# Altium PCB cw312_sam4s.PcbDoc
Units mil, origin at the board's own origin, x right, y up, seen from the top; angles counter-clockwise.
Board outline 2310.04 x 2113.83 mil, 2 copper layers (Top Layer, Bottom Layer); 24 components, 50 nets, 176 pads, 87 vias.
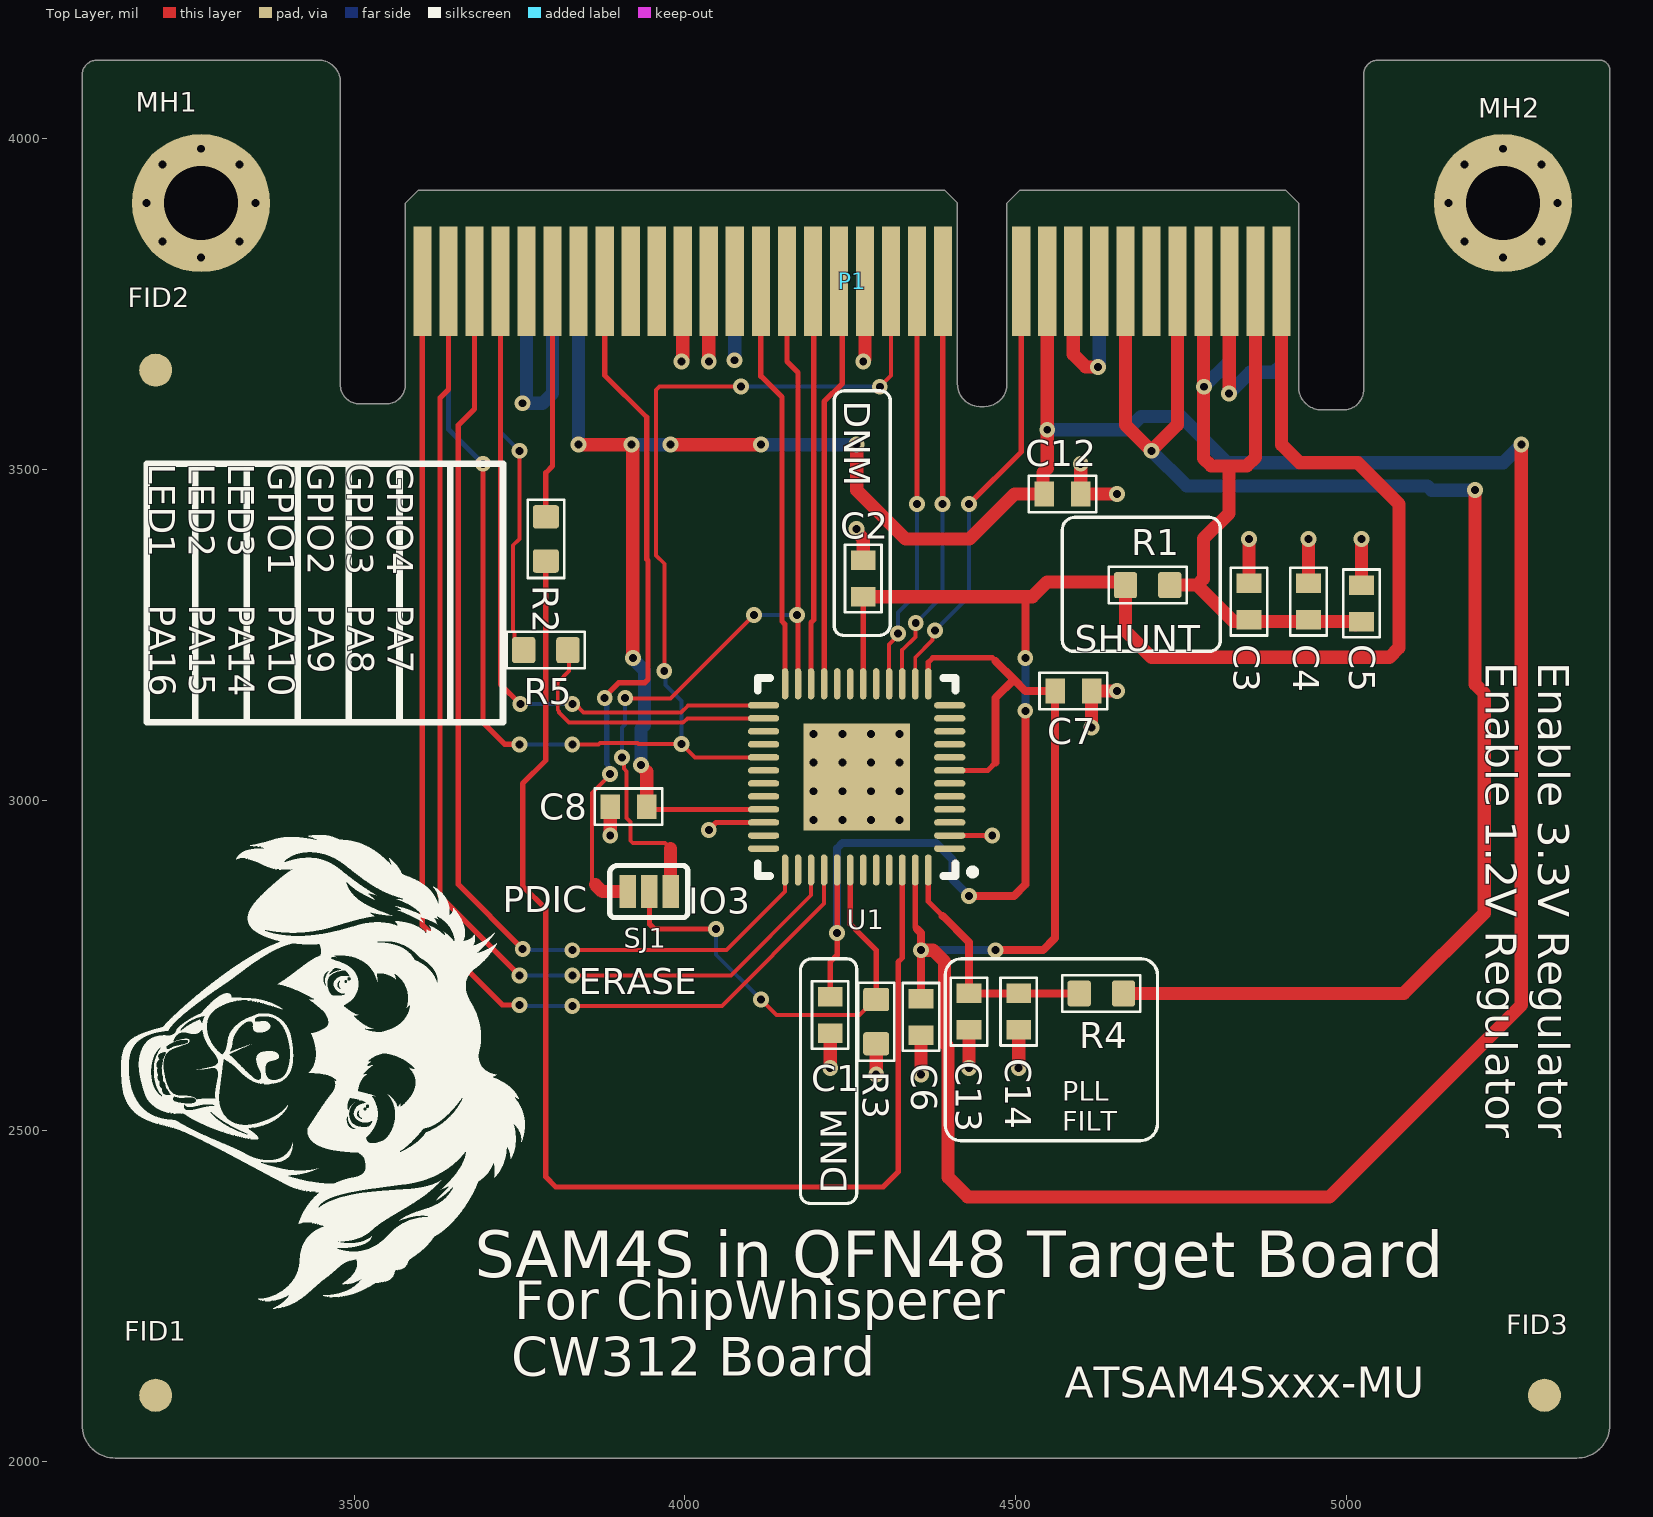
[diagram p0: Top Layer view]
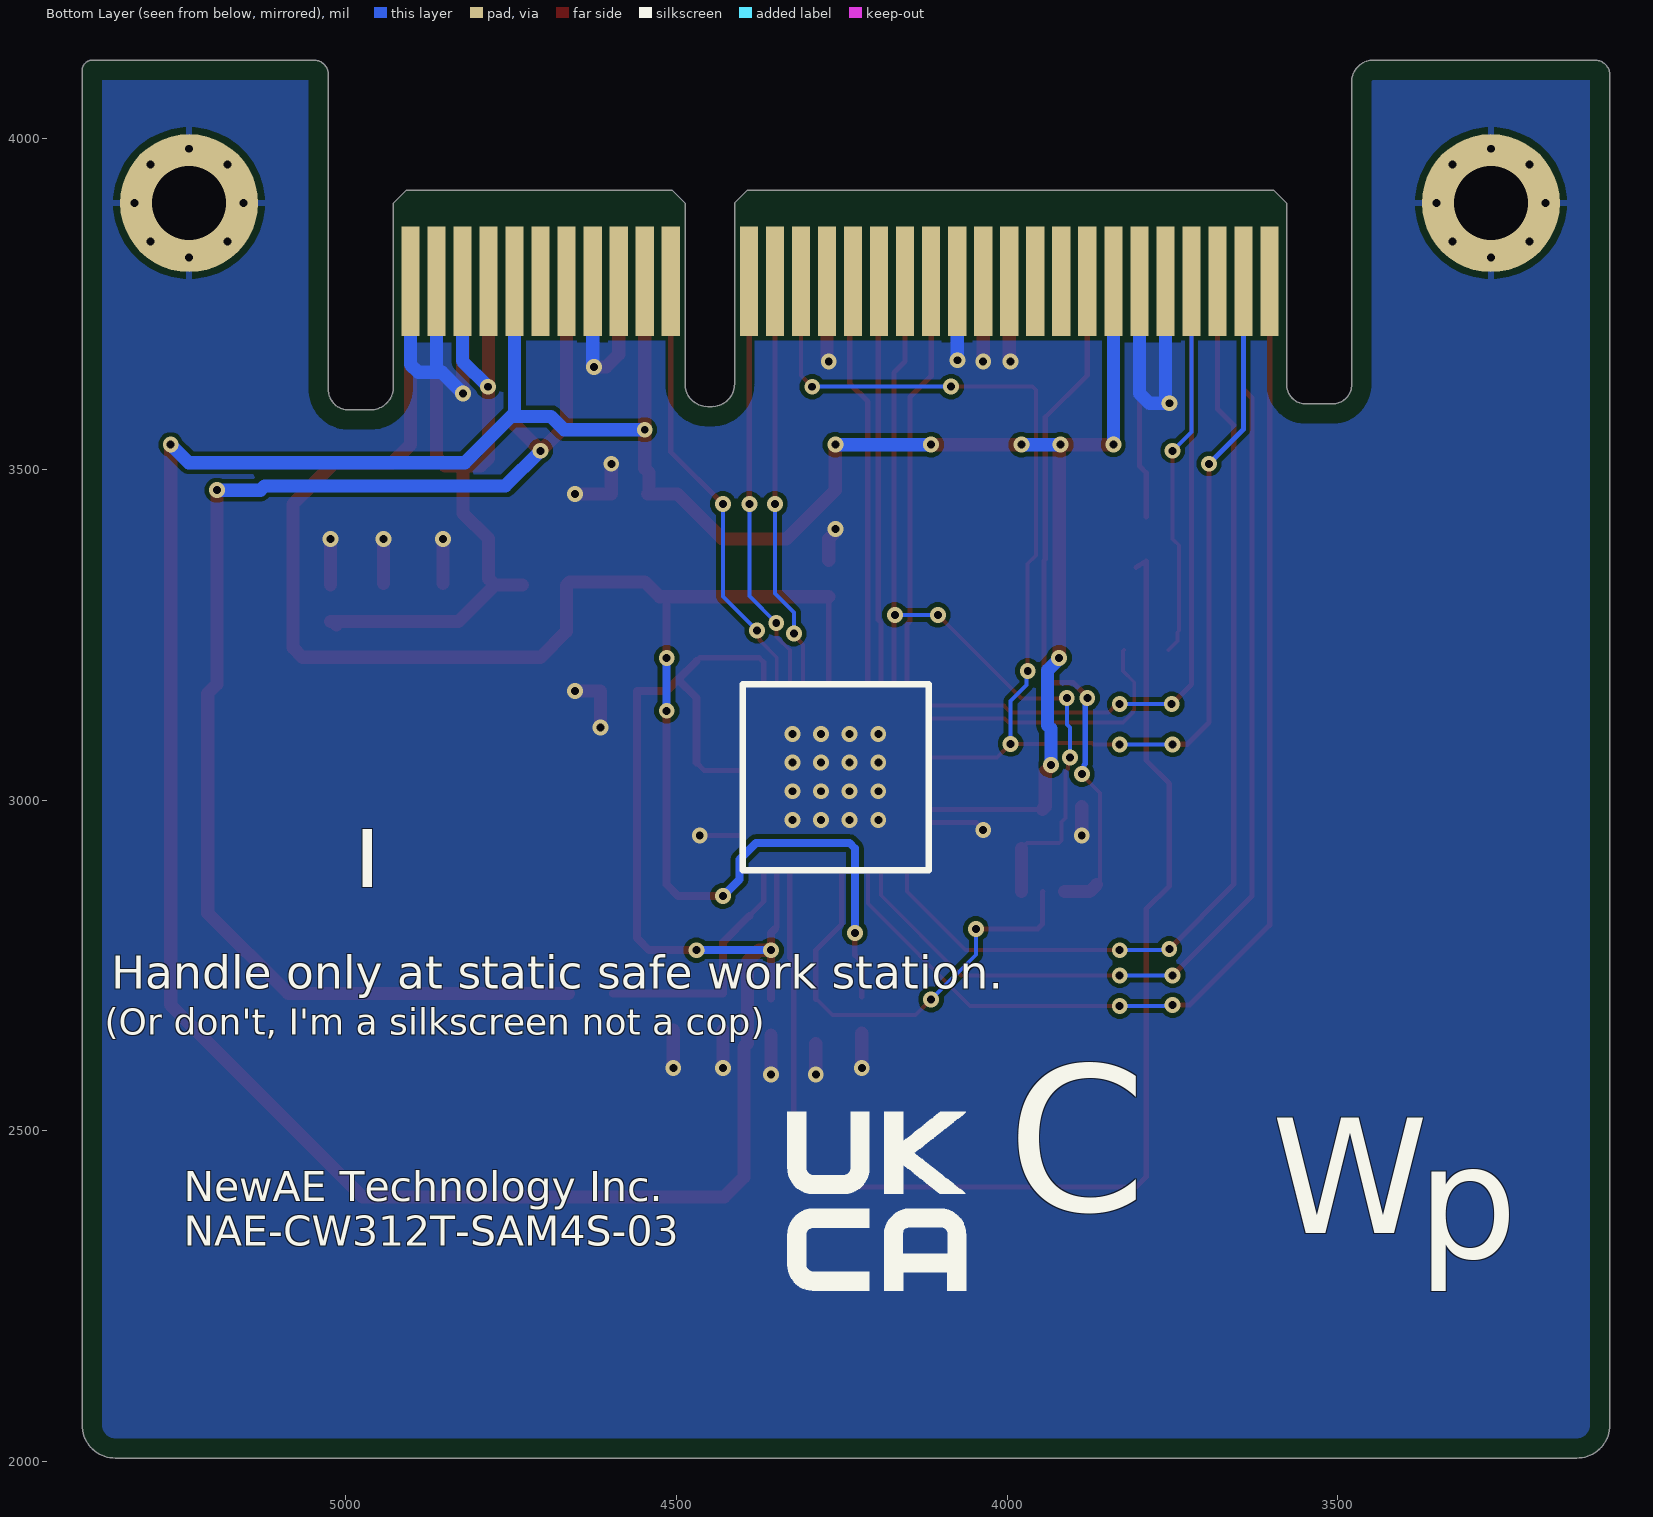
[diagram p1: Bottom Layer view, seen from below]
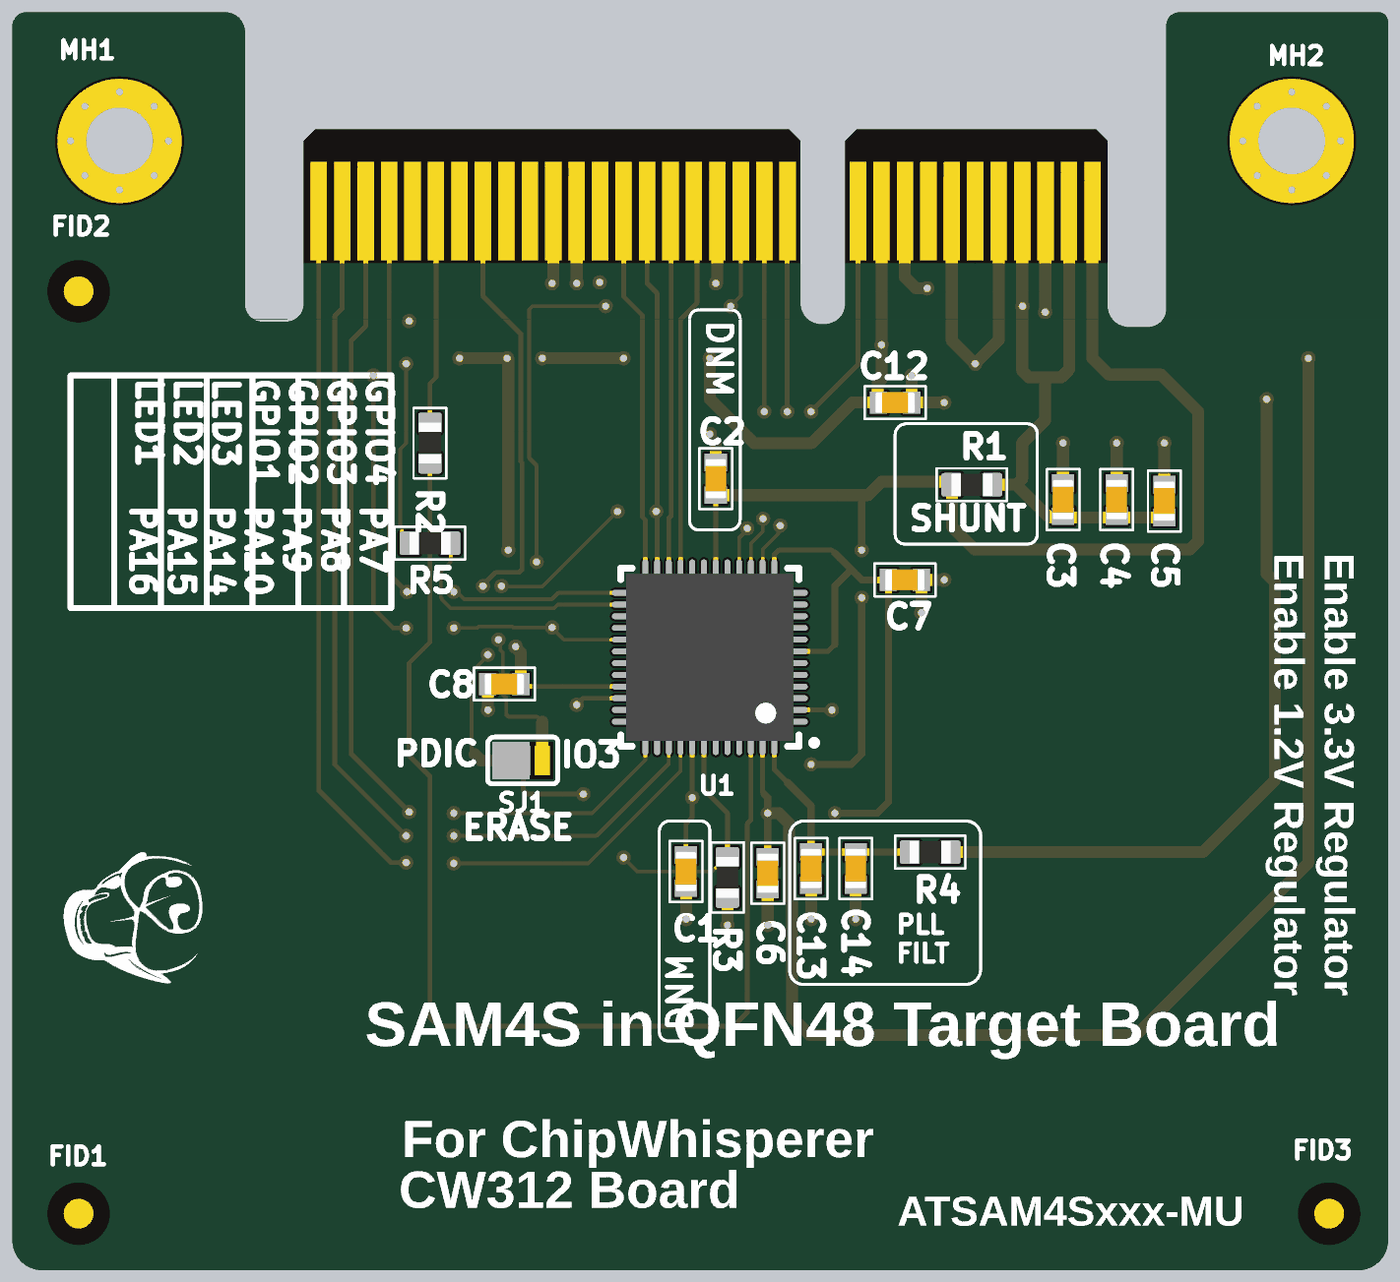
[diagram p2: 3D render of the assembled board from above, using the file's embedded part models]

## Layer stack, top to bottom
Top Solder: solder mask 0.4, Solder Resist, Dk 3.5
Top Layer: signal copper 1.4
Dielectric 1: dielectric 12.6, FR-4, Dk 4.8
Bottom Layer: signal copper 1.4
Bottom Solder: solder mask 0.4, Solder Resist, Dk 3.5

## Board outline
3088.86,2055 ccw(c3138.86,2055) 3138.86,2005 5348.9,2005 ccw(c5348.9,2055) 5398.9,2055 5398.9,4103.09 ccw(c5383.15,4103.09) 5383.15,4118.83 5048.5,4118.83 ccw(c5048.5,4096.91) 5026.58,4096.91 5026.58,3620.53 cw(c4996.05,3620.53) 4996.05,3590 4963.17,3590 cw(c4963.17,3625.02) 4928.15,3625.02 4928.15,3902.65 4908.46,3922.34 4506.89,3922.34 4487.2,3902.65 4487.2,3629.03 cw(c4453.17,3629.03) 4453.17,3595 4446.43,3595 cw(c4446.43,3629.03) 4412.4,3629.03 4412.4,3902.65 4392.72,3922.34 3597.44,3922.34 3577.76,3902.65 3577.76,3628.4 cw(c3548.35,3628.4) 3548.35,3599 3508.41,3599 cw(c3508.41,3628.08) 3479.33,3628.08 3479.33,4085.65 ccw(c3446.14,4085.65) 3446.14,4118.83 3111.5,4118.83 ccw(c3111.5,4096.2) 3088.86,4096.2

## Design rules (kind name [scope] priority, off if disabled: settings)
BoardOutlineClearance Silk_to_Outline [(OnLayer('Top Overlay'))] p1: gap=0 ignorepadtopadclearanceinfootprint=FALSE
BoardOutlineClearance [All] p2: gap=30 ignorepadtopadclearanceinfootprint=FALSE except(5: Track-OutlineEdge Track-CavityEdge Track-CutoutEdge Track-SplitBarrior Track-SplitContinuation SMDPad-OutlineEdge SMDPad-CavityEdge SMDPad-CutoutEdge SMDPad-SplitBarrior SMDPad-SplitContinuation)
Clearance [All] p1: gap=7 ignorepadtopadclearanceinfootprint=FALSE
HoleSize [All] p1: absolutevalues=TRUE maxlimit=200 minlimit=1 maxpercent=80.000 minpercent=20.000
MinimumSolderMaskSliver [All] p1: minsoldermaskwidth=5
PlaneConnect PlaneConnect_viaDirect [IsVia] p1: planeconnectstyle=Direct reliefexpansion=20 reliefentries=4 reliefconductorwidth=10 reliefairgap=10
PlaneConnect [All] p2: planeconnectstyle=Relief reliefexpansion=20 reliefentries=4 reliefconductorwidth=10 reliefairgap=10
PolygonConnect PolygonConnect_viaDirect [All vs isVia] p1: connectstyle=Direct reliefconductorwidth=10 reliefentries=4 polygonreliefangle="90 Angle" airgapwidth=10
PolygonConnect [All] p2: connectstyle=Relief reliefconductorwidth=10 reliefentries=4 polygonreliefangle="90 Angle" airgapwidth=10
RoutingVias [All] p1: holewidth=12 width=24 viastyle="Through Hole" minholewidth=12 minwidth=24 maxholewidth=100 maxwidth=200
SilkToSilkClearance [All] p1: silktosilkclearance=5
SilkToSolderMaskClearance [IsPad] p1: minsilkscreentomaskgap=5 clearancetoexposedcopper=TRUE
SolderMaskExpansion [All] p1: expansion=4 istentingtop=FALSE
Width [All] p1: maxlimit=100 minlimit=6 preferedwidth=8 minimp=50.000000 maximp=50.000000 favimp=50.000000
25 further rules are at their usual default settings.

## Classes and differential pairs
component class cw312_sam4s_cardedge: MH1 MH2 P1
component class "Edge Connector": P1

## Components (designator, comment, footprint, x,y, rotation, side; value= is the part's Value field where it differs from the comment)
C1 "DNM" CAPC0603_M 4220,2675 r270 top value=100n
C2 "DNM" CAPC0603_M 4270,3335 r90 top value=100n
C3 "100n" CAPC0603_M 4853.19,3300 r90 top
C4 "100n" CAPC0603_M 4943.19,3300 r90 top
C5 "2u2" CAPC0603_M 5023.19,3297.44 r90 top
C6 "100n" CAPC0603_M 4357.2,2672.17 r270 top
C7 "100n" CAPC0603_M 4587.6,3165 r0 top
C8 "100n" CAPC0603_M 3915,2990 r180 top
C12 "2u2" CAPC0603_M 4571.21,3462.96 r0 top
C13 "2u2" CAPC0603_M 4430,2680 r270 top
C14 "100n" CAPC0603_M 4505,2680 r270 top
FID1 "FIDU-ROUND-1.0MM" FIDU-ROUND-1.0mm#1 3195,2100 r0 top
FID2 "FIDU-ROUND-1.0MM" FIDU-ROUND-1.0mm#2 3210.57,3663.35 r0 top
FID3 "FIDU-ROUND-1.0MM" FIDU-ROUND-1.0mm#3 5285,2110 r0 top
MH1 "4-40 MH, Tight Fit" MOUNT_#4_TIGHT 3268.7,3902.65 r0 top
MH2 "4-40 MH, Tight Fit" MOUNT_#4_TIGHT 5237.2,3902.65 r0 top
P1 "PCIeX4-GF-2D-1000-1K-O64" PCIeX4-GF-2D-1000-1K-O64 4528.54,3784.54 r180 top
R1 "10R" RESC1608X55N 4700,3325 r0 top
R2 "10R" RESC1608X55N 3790,3394.87 r270 top
R3 "1k" RESC1608X55N 4289.53,2665 r270 top
R4 "100R" RESC1608X55N 4630,2707.56 r180 top
R5 "10R" RESC1608X55N 3790,3226.68 r180 top
SJ1 "NC" SJ_3S_NC12 3946.11,2861.63 r0 top
U1 "ATSAM4S2AA-MU" QFN50P700X700X100_HS-49M 4260,3035 r180 top

## Footprints (in the part's own frame and the unit in brackets; to place one, negate y for a bottom-side part, rotate by r counter-clockwise, add the part's x,y. Pads: shape width x height; smd on the part's side, far side on the other; paste and mask are expansions set on the pad)
CAPC0603_M [mm]
  rect 0.75x0.95 smd: 1(-0.7,0) 2(0.7,0)
  silkscreen extent -1.3,-0.7 1.3,0.7, body extent -0.85,-0.45 0.85,0.45, height 0.9
FIDU-ROUND-1.0mm#1 [mil]
  round 50 smd paste-78.74 mask+27.56: M1(5,0)
FIDU-ROUND-1.0mm#2 [mil]
  round 50 smd paste-78.74 mask+27.56: M1(-10.57,-13.35)
FIDU-ROUND-1.0mm#3 [mil]
  round 50 smd paste-78.74 mask+27.56: M1(15,-10)
MOUNT_#4_TIGHT [mil]
  round 14 hole 12: 1(-82.21,0) 1(-58.13,-58.13) 1(-58.13,58.13) 1(0,-82.21) 1(0,82.21) 1(0,82.21) 1(58.13,-58.13) 1(58.13,58.13) 1(82.21,0)
  round 208.66 hole 112.2: 1(0,0)
PCIeX4-GF-2D-1000-1K-O64 [mm] "Golden finger, PCIeX4, Dual, Opposite, Pitch 1mm, 64-Position"
  rect 0.7x4.2 smd far side paste-1: A1(-9.5,0) A2(-8.5,0) A3(-7.5,0) A4(-6.5,0) A5(-5.5,0) A6(-4.5,0) A7(-3.5,0) A8(-2.5,0) A9(-1.5,0) A10(-0.5,0) A11(0.5,0) A12(3.5,0) A13(4.5,0) A14(5.5,0) A15(6.5,0) A16(7.5,0) A17(8.5,0) A18(9.5,0) A19(10.5,0) A20(11.5,0) A21(12.5,0) A22(13.5,0) A23(14.5,0) A24(15.5,0) A25(16.5,0) A26(17.5,0) A27(18.5,0) A28(19.5,0) A29(20.5,0) A30(21.5,0) A31(22.5,0) A32(23.5,0)
  rect 0.7x4.2 smd paste-1: B1(-9.5,0) B2(-8.5,0) B3(-7.5,0) B4(-6.5,0) B5(-5.5,0) B6(-4.5,0) B7(-3.5,0) B8(-2.5,0) B9(-1.5,0) B10(-0.5,0) B11(0.5,0) B12(3.5,0) B13(4.5,0) B14(5.5,0) B15(6.5,0) B16(7.5,0) B17(8.5,0) B18(9.5,0) B19(10.5,0) B20(11.5,0) B21(12.5,0) B22(13.5,0) B23(14.5,0) B24(15.5,0) B25(16.5,0) B26(17.5,0) B27(18.5,0) B28(19.5,0) B29(20.5,0) B30(21.5,0) B31(22.5,0) B32(23.5,0)
QFN50P700X700X100_HS-49M [mm] "QFN, 48-Leads, Body 7.00x7.00mm, Pitch 0.50mm, Thermal Pad 4.10x4.10mm, IPC Low Density"
  oval 1.2x0.25 smd: 1(-3.575,2.75) 2(-3.575,2.25) 3(-3.575,1.75) 4(-3.575,1.25) 5(-3.575,0.75) 6(-3.575,0.25) 7(-3.575,-0.25) 8(-3.575,-0.75) 9(-3.575,-1.25) 10(-3.575,-1.75) 11(-3.575,-2.25) 12(-3.575,-2.75) 25(3.575,-2.75) 26(3.575,-2.25) 27(3.575,-1.75) 28(3.575,-1.25) 29(3.575,-0.75) 30(3.575,-0.25) 31(3.575,0.25) 32(3.575,0.75) 33(3.575,1.25) 34(3.575,1.75) 35(3.575,2.25) 36(3.575,2.75)
  oval 0.25x1.2 smd: 13(-2.75,-3.575) 14(-2.25,-3.575) 15(-1.75,-3.575) 16(-1.25,-3.575) 17(-0.75,-3.575) 18(-0.25,-3.575) 19(0.25,-3.575) 20(0.75,-3.575) 21(1.25,-3.575) 22(1.75,-3.575) 23(2.25,-3.575) 24(2.75,-3.575) 37(2.75,3.575) 38(2.25,3.575) 39(1.75,3.575) 40(1.25,3.575) 41(0.75,3.575) 42(0.25,3.575) 43(-0.25,3.575) 44(-0.75,3.575) 45(-1.25,3.575) 46(-1.75,3.575) 47(-2.25,3.575) 48(-2.75,3.575)
  rect 4.1x4.1 smd: 49(0,0)
  silkscreen extent -4.57,-3.8 3.8,3.8, body extent -3.58,-3.58 3.58,3.58, height 1
RESC1608X55N [mm] "Chip Resistor, Body 1.6x0.8mm, EIA 0603, IPC Medium Density"
  round 0.254 on Mech15: 0(0,0)
  rrect25% 0.9x1 smd: 1(-0.85,0) 2(0.85,0)
  Top Layer pour cut-out: -0.6,0.5 0.6,0.5 0.6,-0.5 -0.6,-0.5
  silkscreen extent -1.5,-0.7 1.5,0.7, body extent -0.87,-0.47 0.88,0.48, height 0.54
SJ_3S_NC12 [mil] "3-Way Solder Jumper, pads 1-2 closed"
  rect 25x50 smd: 1(-32.43,0) 2(0,0)
  rect 25x50 smd paste-393.7: 3(32.44,0)
  silkscreen extent -60,-39 59,39

## Part data
C1 C2: library part CCHIP-100n-0603, Case-EIA=0603, Case-Metric=1608, Manufacture 1=Kemet, Manufacture Part Number 1=C0603C104K5RACTU, Rated Voltage=50VDC, Supplier Part Number 1=399-5089-2-ND, Component Group=Capacitor, Component Type=Standard, Mounting Technology=SMT, Part Number=CCHIP-100n-0603, Pin Count=2, Supplier 1=Digi-Key
C3 C4 C6 C7 C8 C14: library part CCHIP-100n-0603, "100n, 0603", Case-EIA=0603, Case-Metric=1608, Manufacture 1=Kemet, Manufacture Part Number 1=C0603C104K5RACTU, Rated Voltage=50VDC, Supplier Part Number 1=399-5089-2-ND, Component Group=Capacitor, Component Type=Standard, Mounting Technology=SMT, Part Number=CCHIP-100n-0603, Pin Count=2, Supplier 1=Digi-Key
C5 C12 C13: library part CCHIP-2u2-0603, "2u2, 0603", Case-EIA=0603, Case-Metric=1608, Manufacture 1=Samsung, Manufacture Part Number 1=CL10B225KP8NNNC, Rated Voltage=10VDC, Supplier Part Number 1=1276-1134-2-ND, Component Group=Capacitor, Component Type=Standard, Mounting Technology=SMT, Part Number=CCHIP-2u2-0603, Pin Count=2, Supplier 1=Digi-Key
FID1 FID2 FID3: "ROUND FIDUCIAL", Component Group="PCB Feature", Component Type="Standard (No BOM)", Part Number=FIDU-ROUND-1.0MM, Pin Count=0
MH1 MH2: library part MOUNT_#4_TIGHT, "Machine screw 4-40 Mounting Hole", Component Group=Mechanical, Component Type=Mechanical, Part Number=MOUNT_#4_TIGHT, Pin Count=1, PP Material Stack=0, PP Rotation=0
P1: library part CMP-0001-00031-2, "Golden finger, PCIeX4, Dual, Opposite, Pitch 1mm, 64-Position", ClassName="Edge Connector", Datasheet Version="rev2.0, Apr-2007", Mating Connector=Molex-87715-9106, Package Reference=PCIeX4-GF-2D-1000-1K-O64, Publisher=Altium
R1 R2 R5: library part RCHIP-10R-0603, "10R res, 0603, 1%, 1/10W", Case-EIA=0603, Case-Metric=1608, Manufacture 1=Yageo, Manufacture Part Number 1=RC0603FR-0710RL, Rated Power=0.1W, Rated Voltage=75VDC, Supplier Part Number 1=311-10.0HRCT-ND, Temperature Range="-55C to 155C", Tolerance=1%, Component Group=Resistor, Component Type=Standard, Mounting Technology=SMT, Part Number=RCHIP-10R-0603, Pin Count=2, Supplier 1=Digi-Key
R3: library part RCHIP-1K-0603, "1k res, 0603, 1%, 1/10W", Case-EIA=0603, Case-Metric=1608, Manufacture 1=Yageo, Manufacture Part Number 1=RC0603FR-071KL, Rated Power=0.1W, Rated Voltage=75VDC, Supplier Part Number 1=311-1.00KHRCT-ND, Temperature Range="-55C to 155C", Tolerance=1%, Component Group=Resistor, Component Type=Standard, Mounting Technology=SMT, Part Number=RCHIP-1K-0603, Pin Count=2, Supplier 1=Digi-Key
R4: library part RCHIP-100R-0603, "100R res, 0603, 1%, 1/10W", Case-EIA=0603, Case-Metric=1608, Manufacture 1=Yageo, Manufacture Part Number 1=RC0603FR-07100RL, Rated Power=0.1W, Rated Voltage=75VDC, Supplier Part Number 1=311-100HRCT-ND, Temperature Range="-55C to 155C", Tolerance=1%, Component Group=Resistor, Component Type=Standard, Mounting Technology=SMT, Part Number=RCHIP-100R-0603, Pin Count=2, Supplier 1=Digi-Key
SJ1: library part SJ_3S_12JMP, "Solder Jumper, NC", Component Group="PCB Feature", Component Type="Standard (No BOM)", Mounting Technology=COPPER, Part Number=SJ_3S_12JMP, Pin Count=3
U1: "ATSAM4S, 128KB FLASH, 48QFN", Case/Package=QFN, Frequency=120MHz, Manufacture 1=Microchip, Max Operating Temperature=85°C, Min Operating Temperature=-40°C, Component Group="Digital IC", Component Type=Standard, Core Architecture=ARM, Manufacture Part Number 1=ATSAM4S2AA-MU, Memory Size=128KB, Memory Type=FLASH, Mounting Technology=SMT, Number of I/Os=34, Number of Pins=48, Oscillator Type=Internal, Packaging=Tray, Part Number=ATSAM4S2AA-MU, Peripherals="Brown-out Detect/Reset", Pin Count=49, PP Material Stack=0, PP Rotation=0, PP Rotation1=0, Supplier 1=Digi-Key

## Via types
v1: diameter 24, hole 12, Top Layer to Bottom Layer, tented both sides, 70 vias
v2: diameter 24, hole 12, Top Layer to Bottom Layer, 17 vias

## Nets (pads, with @x,y where several pads share a name; then routed paths per layer and width w, separated by ;. In a path a pad name is that pad's centre, name@x,y a point inside that pad or via, vN(x,y) a via of type N, cw(c..) or ccw(c..) an arc to the next point about the centre after c; other vN are vias at no path point)
BOOT_MODE: P1.B25 SJ1.1 | length 1059.5
  Top Layer w6: 3865,2872.28 3860,2877.28 3860,3010.55 3887.2,3037.74 v1(3887.2,3039.15)
  Top Layer w8: P1.B25 3878.94,3642.43 3942.56,3578.8 3942.56,3364.09 3944.56,3362.09 3944.56,3182.25 3939.87,3177.57 3900.47,3177.57 3879,3156.09 v1(3879,3154.57)
  Top Layer w20: 3865,2872.28 3875.65,2861.63 SJ1.1
  Bottom Layer w8: v1(3879,3154.57) 3882,3151.57 3882,3055 3884.14,3052.87 3884.14,3042.21 v1(3887.2,3039.15)
CLK_FROM_SAM: P1.A29 R5.2 | length 580.7
  Top Layer w6: v2(3750,3528.15) 3750,3394.81 3740,3384.81 3740,3256.35 3742.7,3253.65 3742.7,3240.52 R5.2
  Bottom Layer w6: P1.A29 3721.46,3556.69 v2(3750,3528.15)
CLKIN: P1.B27 R2.1 | length 360.4
  Top Layer w8: R2.1 3790,3495 3800.2,3505.2 P1.B27
CS: P1.B26
FILT_HP: C3.1 C4.1 C5.1 P1.A3 P1.B2 P1.B4 R1.2 | length 1318
  Top Layer w20: R1.2 4775,3325 ; P1.B4 4784.45,3516.91 4796.16,3505.2 4823.04,3505.2 ; P1.B2 4863.19,3518.46 4849.92,3505.2 4823.04,3505.2 ; C5.1@5014.37,3265 C5.1@5019.25,3269.88 ; C5.1 C5.1@5019.25,3269.88 ; 4775,3325 4784.45,3334.45 4784.45,3395 4823.04,3433.59 4823.04,3505.2 ; 4775,3325 4830.12,3269.88 C5.1@5019.25,3269.88
  Bottom Layer w20: v1(4785,3625) 4823.82,3663.82 P1.A3
FILTIN: P1.B5 P1.B7 R4.1 | length 2300.5
  Top Layer w20: R4.1 5087.56,2707.56 5208.92,2828.92 5208.92,3161.18 5195,3175.1 v1(5195,3468.59) ; P1.B7 4666.34,3567.52 v1(4705.71,3528.15) 4745.08,3567.52 P1.B5
  Bottom Layer w20: v1(4705.71,3528.15) 4758.86,3475 5123,3475 5129.41,3468.59 v1(5195,3468.59)
GND: C1.2 C2.2 C3.2 C4.2 C5.2 C6.2 C7.2 C8.2 C12.2 C13.2 C14.2 MH1.1 MH2.1 P1.A1 P1.A2 P1.A8 P1.A20 P1.A27 P1.A28 P1.B3 P1.B9 P1.B15 P1.B21 P1.B22 R3.2 U1.2 U1.34 U1.49 | length 2631.7
  Top Layer w8: v1(4036.42,2955) 4047.52,2966.1 U1.34 ; U1.2 4453.58,2946.42 4455.98,2944.02 4462.6,2944.02 v1(4465,2946.42)
  Top Layer w20: v1(3887.44,2946.42) C8.2 ; v1(3995,3663.35) 3995,3665 3997.05,3667.05 P1.B22 ; v1(4036.42,3663.35) P1.B21 ; v1(4220,2595) C1.2 ; v1(4260,3410) 4260,3404.84 4269.84,3395 4269.84,3362.72 C2.2 ; v1(4270,3663.35) 4272.64,3665.98 P1.B15 ; v1(4289.53,2584.88) R3.2 ; v1(4357.2,2585) C6.2 ; v1(4430,2595) C13.2 ; v1(4505,2595) C14.2 ; P1.B9 4587.6,3673.78 4606.38,3655 v1(4625,3655) ; v1(4598.77,3508.46) C12.2 v1(4653.62,3462.96) ; v1(4615.16,3110) C7.2 v1(4653.62,3165) ; v1(4823.04,3615) 4823.43,3615.39 4823.43,3784.16 P1.B3 ; C3.2 v1(4853.19,3395) ; C4.2 v1(4943.19,3395) ; C5.2 v1(5023.19,3395)
  Bottom Layer w20: P1.A28 3760.83,3605.84 v1(3754.99,3600) 3785,3600 3800.2,3615.2 P1.A27 ; v1(4075,3665) 4075.79,3665.79 P1.A20 ; v1(4625,3655) 4626.97,3656.97 P1.A8 ; v1(4823.04,3615) 4854.93,3646.89 4863.19,3646.89 ; P1.A2 4863.19,3646.89 ; P1.A1 4902.56,3658.61 4890.84,3646.89 4863.19,3646.89
  other v2: 4195.04,2970.04 4238.35,2970.04 4281.65,2970.04 4324.96,2970.04 4195.04,3013.35 4238.35,3013.35 4281.65,3013.35 4324.96,3013.35 4195.04,3056.65 4238.35,3056.65 4281.65,3056.65 4324.96,3056.65 4195.04,3099.96 4238.35,3099.96 4281.65,3099.96 4324.96,3099.96
GPIO1_TX: P1.B16 U1.21 | length 622.3
  Top Layer w8: U1.21 4210.79,3602.44 4238.35,3630 4238.35,3779.47 P1.B16
GPIO2_RX: P1.B17 U1.22 | length 610.9
  Top Layer w8: U1.22 4191.1,3268.58 4195.04,3272.51 4195.04,3783.4 P1.B17
GPIO3: P1.B18 SJ1.3 U1.23 | length 1282.3
  Top Layer w6: v1(3905,3064.53) 3908,3061.53 3908,3047.54 3912.2,3043.34 3912.2,2972.75 3918.31,2966.65 3918.31,2938.51 3921.82,2935 3970.29,2935 3978.56,2926.73 ; v1(3910,3154.57) 3910.82,3153.75 3978.75,3153.75 v1(4105,3280)
  Top Layer w8: P1.B18 4154.53,3663.35 4171.42,3646.46 U1.23
  Top Layer w20: SJ1.3 3978.56,2926.73
  Bottom Layer w6: v1(3905,3064.53) 3905,3109.48 3910,3114.48 v1(3910,3154.57) ; v1(4105,3280) v1(4170,3280)
GPIO4: P1.B19 U1.24 | length 623.9
  Top Layer w8: P1.B19 4115.16,3641.06 4147,3609.22 4147,3270.47 4151.73,3265.74 U1.24
HDR1: P1.A9
HDR2: P1.A10
HDR3: P1.A11
HDR4: P1.A12
HDR5: P1.A13
HDR6: P1.A14
HDR7: P1.A15
HDR8: P1.A16
HDR9: P1.A17
HDR10: P1.A18
IOVREF: C6.1 C7.1 C8.1 C12.1 P1.A5 P1.A26 P1.B10 U1.7 U1.13 U1.33 U1.47 | length 6576.8
  Top Layer w8: C8.1@3946.77,2985.79 U1.33 ; U1.47 4348.58,2807.8 4351.38,2805 ; U1.13 4368.27,3208.27 4375,3215 4465,3215 4470,3210 ; U1.7 4458.19,3044.84 4470,3056.65
  Top Layer w12: 4351.38,2805 4357.2,2799.18 v1(4357.2,2773.01) C6.1 ; v1(4470,2773.01) 4541.66,2773.01 4560.04,2791.38 C7.1 4515,3165 4497.72,3182.28 ; 4470,3056.65 4470,3154.57 4497.72,3182.28 ; 4470,3210 4497.72,3182.28
  Top Layer w20: v1(3839.57,3537.44) v1@3921.56,3537.44 ; v1@3921.41,3537.44 3920.32,3536.36 3920.32,3535.59 3921.56,3534.36 v1(3921.56,3215) ; v1(3933.74,3052.91) 3933.74,3051.83 3942.56,3043.01 C8.1 C8.1@3946.77,2985.79 ; v1(3978.56,3537.44) v1(4115.16,3537.44) ; v1(4260,3537.44) 4260,3468.59 4333.72,3394.87 4430.81,3394.87 4498.89,3462.96 C12.1 4541.66,3464.95 4541.66,3495 4548.23,3501.57 v1(4548.23,3560) P1.B10 ; v1(4357.2,2773.01) 4375.58,2773.01 4392.9,2755.69 4392.9,2632.04 4398.28,2626.65 4398.28,2429.5 4427.78,2400 4975,2400 5265,2690 v1(5265,3537.44)
  Bottom Layer w12: v1(4357.2,2773.01) v1(4470,2773.01)
  Bottom Layer w20: v1(3839.57,3537.44) P1.A26 ; v1(3919.56,3537.44) v1(3978.56,3537.44) ; v1(3921.56,3215) 3921.56,3213.92 3939,3196.48 3939,3112.92 3934,3107.92 3934,3053.17 v1(3933.74,3052.91) ; v1(4115.16,3537.44) v1(4260,3537.44) ; v1(4548.23,3560) 4670,3560 4690,3580 4750,3580 ; P1.A5 4745.08,3584.92 4750,3580 ; v1(5265,3537.44) 5237.56,3510 4820,3510 4750,3580
JTAG_TCK: P1.B32 U1.40 | length 1746.8
  Top Layer w6: v1(3830,2688.62) 4056.06,2688.62 4210.79,2843.35 U1.40
  Top Layer w8: P1.B32 3603.35,2810.84 3724.18,2690 v1(3750,2690)
  Bottom Layer w6: v1(3750,2690) 3751.38,2688.62 v1(3830,2688.62)
JTAG_TDI: P1.B29 U1.25 | length 1029.4
  Top Layer w6: v1(3830,3145) 3834.83,3145 3847.27,3132.57 3994.62,3132.57 4005.32,3143.27 U1.25
  Top Layer w8: P1.B29 3721.46,3174.92 v1(3751.38,3145)
  Bottom Layer w6: v1(3751.38,3145) v1(3830,3145)
JTAG_TDO: P1.B30 U1.37 | length 1526.8
  Top Layer w6: v1(3830,2773.01) 4063.11,2773.01 4151.73,2861.63 U1.37
  Top Layer w8: P1.B30 3682.09,3591.58 3657.72,3567.21 3657.72,2872.28 v1(3755,2775)
  Bottom Layer w6: v1(3755,2775) 3756.99,2773.01 v1(3830,2773.01)
JTAG_TMS: P1.B31 U1.39 | length 1633.9
  Top Layer w6: v1(3830,2735) 4070,2735 4191.1,2856.1 U1.39
  Top Layer w8: P1.B31 3642.72,3620.89 3630,3608.17 3630,2855 v1(3750,2735)
  Bottom Layer w6: v1(3750,2735) 3754.99,2735.01 v1(3830,2735)
JTAG_TRST: P1.A32
LED1: P1.B11 U1.14 | length 675.2
  Top Layer w6: U1.14 4348.58,3215.83 4374.8,3242.05 4374.8,3252.95 v1(4378.2,3256.35)
  Top Layer w8: v1(4430,3447.72) 4508.86,3526.57 P1.B11
  Bottom Layer w6: v1(4378.2,3256.35) 4430,3308.15 v1(4430,3447.72)
LED2: P1.B12 U1.15 | length 634.4
  Top Layer w6: U1.15 4328.9,3226.68 4348.87,3246.66 4348.87,3267.19 v1(4349.34,3267.66)
  Top Layer w8: v1(4390,3447.72) 4390,3783.8 P1.B12
  Bottom Layer w6: v1(4349.34,3267.66) 4390,3308.32 v1(4390,3447.72)
LED3: P1.B13 U1.16 | length 626.3
  Top Layer w6: U1.16 4309.21,3235.55 4322.78,3249.11 v1(4322.78,3251.68)
  Top Layer w8: v1(4351.38,3447.72) P1.B13
  Bottom Layer w6: v1(4322.78,3251.68) 4322.78,3283.73 4351.38,3312.33 v1(4351.38,3447.72)
MISO: P1.B23
MOSI: P1.B24
NetC13_1: C13.1 C14.1 R4.2 U1.48 | length 378.8
  Top Layer w8: U1.48 4368.27,2846.73 4390,2825
  Top Layer w12: 4390,2825 4430,2785 C13.1 C14.1 R4.2
NetR2_2: R2.2 U1.46 | length 1985.9
  Top Layer w8: R2.2@3805.26,3351.75 R2.2 3790,3060.17 3754.99,3025.16 3754.99,2870.01 3790,2835 3790,2430 3805,2415 4300,2415 4322.78,2437.78 4322.78,2755 4328.9,2761.12 U1.46
NetR3_1: R3.1 SJ1.2 U1.42 | length 693.8
  Top Layer w6: v1(4115.16,2698.46) 4138.62,2675 4264.09,2675 4287.56,2698.46 R3.1
  Top Layer w8: SJ1.2 3946.77,2860.97 3946.77,2812.38 3954.15,2805 v1(4047.52,2805) ; U1.42 4250.16,2812.38 4289.53,2773.01 R3.1
  Bottom Layer w6: v1(4047.52,2805) 4047.52,2766.1 v1(4115.16,2698.46)
NetR5_1: R5.1 U1.26 | length 421.1
  Top Layer w6: R5.1 3825.04,3225.11 3825.04,3195.22 3808,3178.18 3808,3135.89 3809.69,3134.2 3809.69,3132.57 3825.04,3117.21 3997.65,3117.21 4004.02,3123.58 U1.26
nRST: P1.A31 P1.B14 U1.29 | length 2194.9
  Top Layer w6: v1(3830,3084.21) 3869.66,3084.21 3871.98,3086.53 3928.57,3086.53 3930.1,3085 v1(3995,3085) 4015.47,3064.53 U1.29 ; v1(3969.1,3195.22) 3969.1,3357.35 3956.56,3369.89 3956.56,3619.77 3961.87,3625.08 v1(4085,3625.08) ; v1(4295,3625) 4312.01,3642.01 P1.B14
  Top Layer w8: v1(3695,3508.46) 3695,3117.21 3728,3084.21 v1(3750,3084.21)
  Bottom Layer w6: v1(3750,3084.21) v1(3830,3084.21) ; v1(3969.1,3195.22) 3970.64,3193.68 3970.64,3174.22 3995,3149.85 v1(3995,3085) ; v1(4085,3625.08) 4294.92,3625.08 v1(4295,3625)
  Bottom Layer w8: P1.A31 3642.72,3560.75 v1(3695,3508.46)
nRST_OUT: P1.A19
SCK: P1.B20
SHUNTL: C1.1 C2.1 P1.B1 R1.1 U1.18 U1.41 | length 2831.9
  Top Layer w8: C1.1 4220,2755 4230.47,2765.47 v1(4230.47,2799.18) U1.41 ; U1.18 4269.84,3307.28 C2.1
  Top Layer w12: v1(4430,2855) 4497.72,2855 4515,2872.28 v1(4515,3135) ; 4508.86,3307.44 4515,3301.3 v1(4515,3215)
  Top Layer w20: C2.1 4508.86,3307.44 4525.79,3307.44 4548.23,3329.88 4661.65,3329.88 R1.1 4666.54,3255.01 4705.71,3215.83 5065.83,3215.83 5080,3230 5080,3447.72 5017.72,3510 4930,3510 4902.56,3537.44 P1.B1
  Bottom Layer w12: v1(4230.47,2799.18) 4230.47,2927.13 4238.35,2935 4380,2935 4405,2910 4405,2880 v1(4430,2855) ; v1(4515,3135) v1(4515,3215)
TRACECLK: P1.A21
TRACED0: P1.A22
TRACED1: P1.A23
TRACED2: P1.A24
TRACED3: P1.A25
VCC1.0: P1.B6
VCC1.8: P1.B8
VCC2.5: P1.A4
VCC5.0: P1.A6
VCCADJ: P1.A7
pads on no net: FID1.M1 FID2.M1 FID3.M1 P1.A30 P1.B28 R1.0 R2.0 R3.0 R4.0 R5.0 U1.1 U1.3 U1.4 U1.5 U1.6 U1.8 U1.9 U1.10 U1.11 U1.12 U1.17 U1.19 U1.20 U1.27 U1.28 U1.30 U1.31 U1.32 U1.35 U1.36 U1.38 U1.43 U1.44 U1.45

## Polygon pours and split planes (outlines as drawn)
GND on Bottom Layer "GND_L02_P000" (solid, remove dead copper, pour order 0): 3085,4145 3105,4125 3490,4125 3490,3850 3590,3750 4960,3750 4960,4130 5020,4190 5555,4190 5555,1960 5345,1750 3000,1750

## Silkscreen, mask and mechanical layers (free items; w line width, h text height)
Top Overlay:
  drawing of 53 lines, arcs and shapes, not listed
  text "DNM" at 4240.91,3603.81 h40 r270
  text "GPIO4 / GPIO3 / GPIO2 / GPIO1 / LED3 / LED2 / LED1" at 3190.02,3508.46 h40 r270
  text "PA7 / PA8 / PA9 / PA10 / PA14 / PA15 / PA16" at 3190.87,3295 h40 r270
  text "SHUNT" at 4590,3225 h40
  text "Enable 3.3V Regulator / Enable 1.2V Regulator" at 5195,3208.27 h80 r270
  text "PDIC" at 3725.15,2830.13 h40
  text "IO3" at 4005.01,2828.14 h40
  text "ERASE" at 3839.57,2706.11 h40
  text "PLL / FILT" at 4570.94,2500 h30
  text "DNM" at 4245.01,2404.99 h40 r90
  text "SAM4S in QFN48 Target Board" at 3682.56,2255 h120
  text "For ChipWhisperer" at 3742.56,2195 h100
  text "CW312 Board" at 3737.56,2110 h100
  text "ATSAM4Sxxx-MU" at 4575,2080 h80
Bottom Overlay:
  drawing of 8 lines, arcs and shapes, not listed
  text "i" at 4990,2830 h200
  text "Handle only at static safe work station." at 5355,2715 h50
  text "(Or don't, I'm a silkscreen not a cop)" at 5365,2645 h40
  text "NewAE Technology Inc. / NAE-CW312T-SAM4S-03" at 5245,2325.8 h45
  text "C" at 4000,2293.04 h450
  text "W" at 3600,2287.64 h300
  text "p" at 3380,2250 h300
Mechanical 1:
  lines w3.94: 3088.86,4054.54 3088.86,4096.2 cw(c3111.5,4096.2) 3111.5,4118.83 3446.14,4118.83 cw(c3446.14,4085.65) 3479.33,4085.65 3479.33,3696.1 3479.33,3628.08 ; 3577.76,3628.4 3577.76,3696.1 3577.76,3902.65 3597.44,3922.34 4392.72,3922.34 4412.4,3902.65 4412.4,3629.03 ; 4487.2,3629.03 4487.2,3902.65 4506.89,3922.34 4908.46,3922.34 4928.15,3902.65 4928.15,3697.44 4928.15,3625.02 ; 5026.58,3620.53 5026.58,4096.91 cw(c5048.5,4096.91) 5048.5,4118.83 5383.15,4118.83 cw(c5383.15,4103.09) 5398.9,4103.09
  lines w3.97: 3088.86,4054.54 3088.86,2055 ccw(c3138.86,2055) 3138.86,2005 5348.9,2005 ccw(c5348.9,2055) 5398.9,2055 5398.9,4103.09 ; 3479.33,3628.08 ccw(c3508.41,3628.08) 3508.41,3599 3548.35,3599 ccw(c3548.35,3628.4) 3577.76,3628.4 ; 4412.4,3629.03 ccw(c4446.43,3629.03) 4446.43,3595 4453.17,3595 ccw(c4453.17,3629.03) 4487.2,3629.03 ; 4928.15,3625.02 ccw(c4963.17,3625.02) 4963.17,3590 4996.05,3590 ccw(c4996.05,3620.53) 5026.58,3620.53